# EAGLE board WayHugeAngryTroll-Panel (EAGLE 8.4.1)
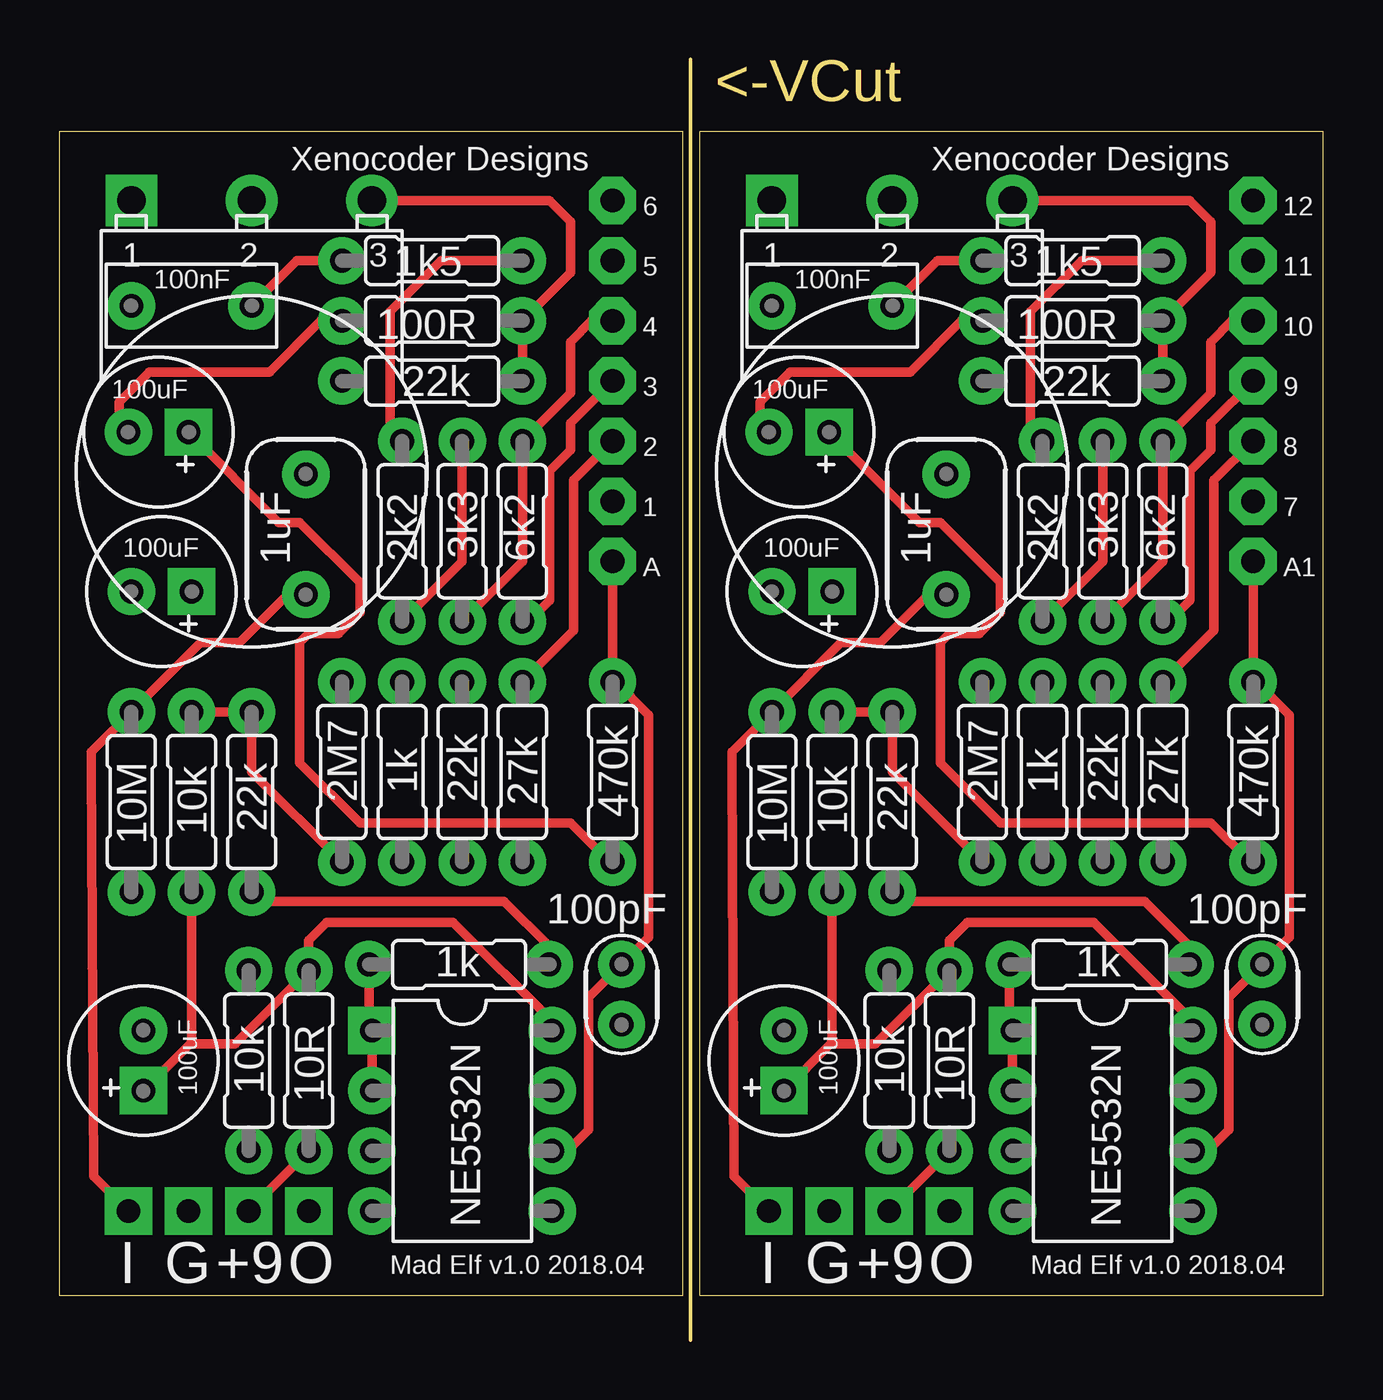
[diagram p0: board, top side]
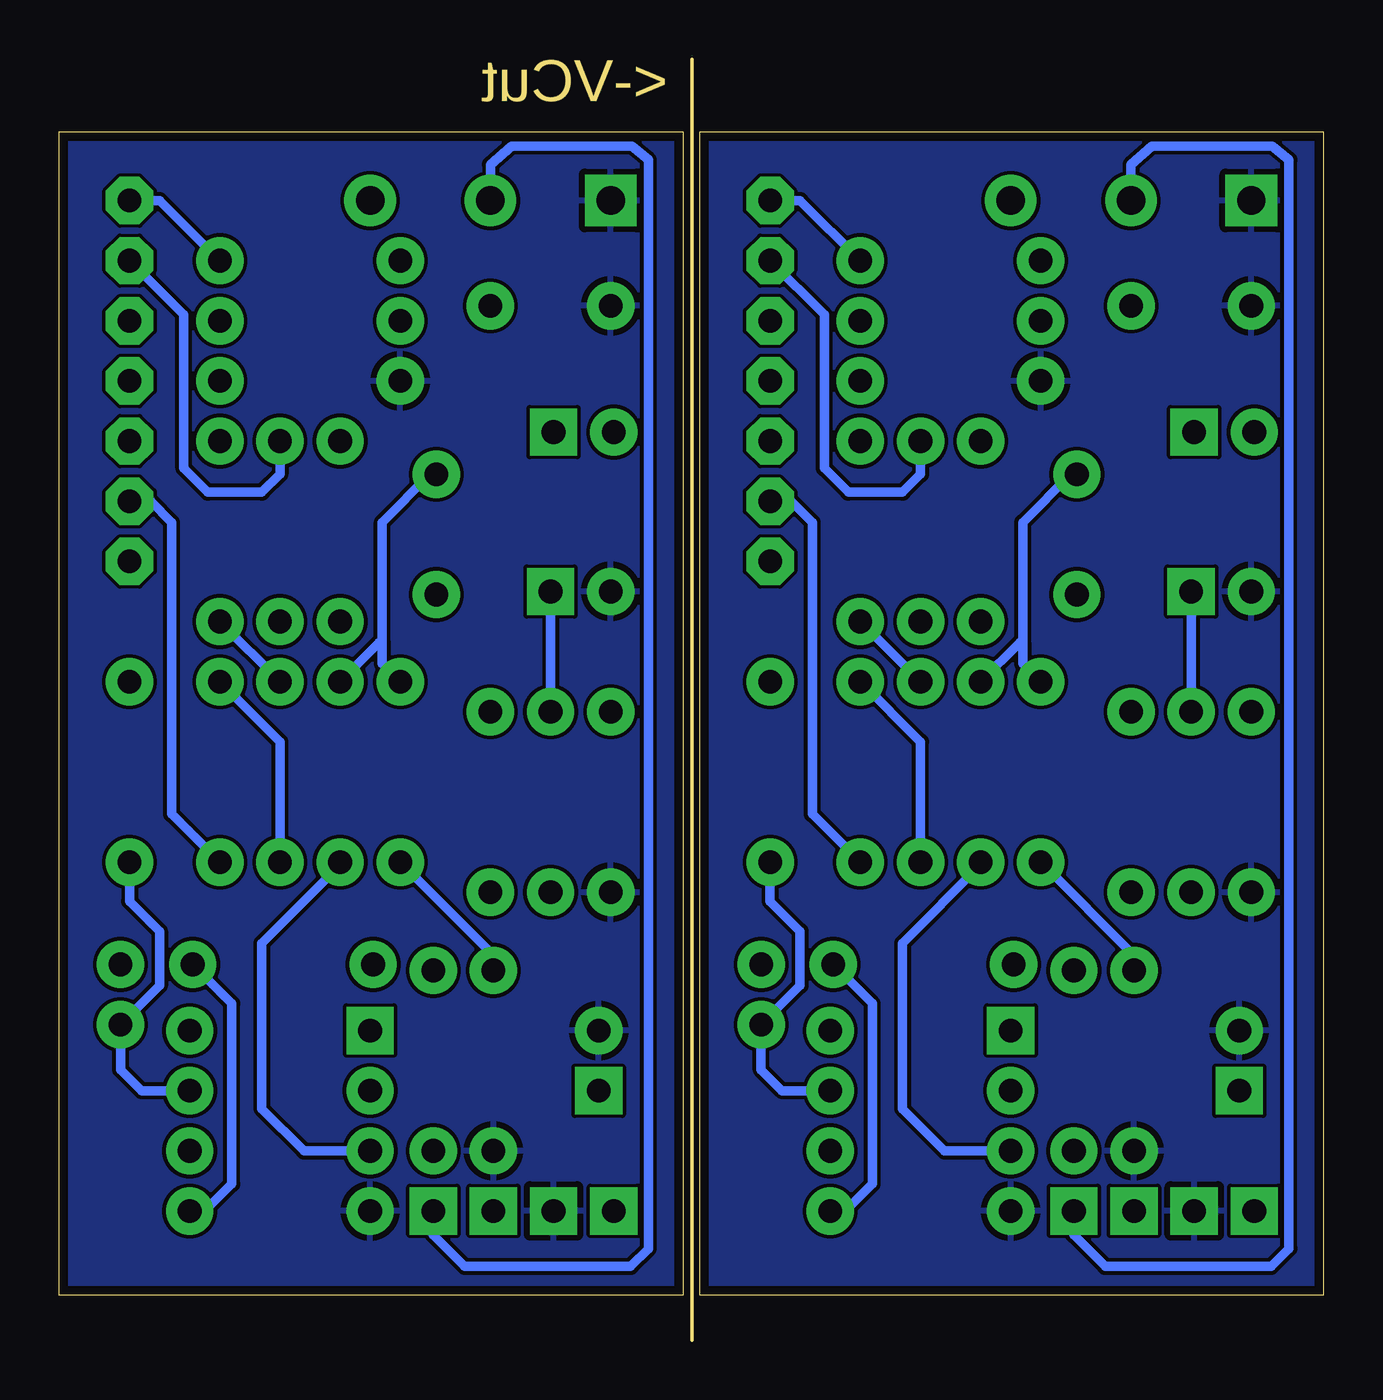
[diagram p1: board, bottom side, seen from below]

Size 53.39 x 54.1 mm. Coordinates in mm from the lower left corner, seen from the top.
Outline: 26.67,54.1 26.67,0
Outline: 0,1.91 26.34,1.91 26.34,51.04 0,51.04 0,1.91
Outline: 27.05,1.91 53.39,1.91 53.39,51.04 27.05,51.04 27.05,1.91
Copper layers (1*16): Top 0.035559375mm / dielectric 1.6mm / Bottom 0.035559375mm
Design rules "oshpark-2layer": minimum track width 6mil, minimum drill 10mil, track to track 6mil, track to pad 6mil, pad to pad 6mil, via to via 6mil, smd to smd 6mil, copper to edge 15mil, drill to drill 6mil, minimum pad ring 5mil, minimum via ring 5mil, stop-mask expansion 2.5mil, vias tented up to drill 0mil, thermal gap 10mil

## Footprints (pad centres in the part's own frame; a part is rotated, then mirrored left to right if it is on the bottom)
OCTOGON = drill 1 pad 2 octagon: 1 0,0
SQUARE = drill 1 pad 2 square: 1 0,0
063_025 = drill 1 pad 2 square: + -1.27,0 | drill 1 pad 2: - 1.27,0
080X050 = drill 1 pad 2: 1 -2.54,0; 2 2.54,0
072X035 = drill 1 pad 2: 1 -2.54,0; 2 2.54,0
050X030_025 = drill 1 pad 2: 1 -1.27,0; 2 1.27,0
DIL08 = drill 1 pad 2 square: 1 -3.81,-3.81 | drill 1 pad 2: 2 -1.27,-3.81; 3 1.27,-3.81; 4 3.81,-3.81; 5 3.81,3.81; 6 1.27,3.81; 7 -1.27,3.81; 8 -3.81,3.81
16MM-ROUND = drill 1.2 pad 2.184 square: 1 5.08,0 | drill 1.2 pad 2.184: 2 0,0; 3 -5.08,0
R0207/3 = drill 1 pad 2: 1 -3.81,0; 2 3.81,0

## Placement (x,y rotation side)
1  [OCTOGON]  23.37,35.43 0 top
2  [OCTOGON]  23.37,37.97 0 top
3  [OCTOGON]  23.37,40.51 0 top
4  [OCTOGON]  23.37,43.05 0 top
5  [OCTOGON]  23.37,45.59 0 top
6  [OCTOGON]  23.37,48.13 0 top
7  [OCTOGON]  50.42,35.43 0 top
8  [OCTOGON]  50.42,37.97 0 top
9  [OCTOGON]  50.42,40.51 0 top
10  [OCTOGON]  50.42,43.05 0 top
11  [OCTOGON]  50.42,45.59 0 top
12  [OCTOGON]  50.42,48.13 0 top
+1  +9V(T)  [SQUARE]  35.05,5.46 0 top
+9  +9V(T)  [SQUARE]  8,5.46 0 top
A  [OCTOGON]  23.37,32.89 0 top
A1  [OCTOGON]  50.42,32.89 0 top
C1  100uF  [063_025]  3.56,11.81 90 top
C2  100uF  [063_025]  4.32,31.62 180 top
C3  100uF  [063_025]  4.19,38.35 180 top
C4  1uF  [080X050]  10.41,34.04 90 top
C5  100nF  [072X035]  5.59,43.69 0 top
C6  100pF  [050X030_025]  23.75,14.61 270 top
C7  100uF  [063_025]  30.61,11.81 90 top
C8  100uF  [063_025]  31.37,31.62 180 top
C9  100uF  [063_025]  31.24,38.35 180 top
C10  1uF  [080X050]  37.47,34.04 90 top
C11  100nF  [072X035]  32.64,43.69 0 top
C12  100pF  [050X030_025]  50.8,14.61 270 top
G  GND(T)  [SQUARE]  5.46,5.46 0 top
G1  GND(T)  [SQUARE]  32.51,5.46 0 top
I  IN(T)  [SQUARE]  2.92,5.46 0 top
I1  IN(T)  [SQUARE]  29.97,5.46 0 top
IC1  NE5532N  [DIL08]  17.02,9.27 270 top
IC2  NE5532N  [DIL08]  44.07,9.27 270 top
O  OUT(T)  [SQUARE]  10.54,5.46 0 top
O1  OUT(T)  [SQUARE]  37.59,5.46 0 top
POT1  A10k  [16MM-ROUND]  8.13,48.13 180 top
POT2  A10k  [16MM-ROUND]  35.18,48.13 180 top
R1  10R  [R0207/3]  10.54,11.81 270 top
R2  10k  [R0207/3]  5.59,22.73 270 top
R3  10k  [R0207/3]  8,11.81 90 top
R4  10M  [R0207/3]  3.05,22.73 90 top
R5  2M7  [R0207/3]  11.94,24 90 top
R6  1k  [R0207/3]  14.48,24 90 top
R7  1k  [R0207/3]  16.89,15.88 180 top
R8  22k  [R0207/3]  8.13,22.73 270 top
R9  100R  [R0207/3]  15.75,43.05 180 top
R10  22k  [R0207/3]  15.75,40.51 0 top
R11  470k  [R0207/3]  23.37,24 90 top
R12  1k5  [R0207/3]  15.75,45.59 180 top
R13  2k2  [R0207/3]  14.48,34.16 90 top
R14  3k3  [R0207/3]  17.02,34.16 90 top
R15  6k2  [R0207/3]  19.56,34.16 90 top
R16  22k  [R0207/3]  17.02,24 90 top
R17  27k  [R0207/3]  19.56,24 90 top
R18  10R  [R0207/3]  37.59,11.81 270 top
R19  22k  [R0207/3]  42.8,40.51 0 top
R20  470k  [R0207/3]  50.42,24 90 top
R21  1k5  [R0207/3]  42.8,45.59 180 top
R22  2k2  [R0207/3]  41.53,34.16 90 top
R23  3k3  [R0207/3]  44.07,34.16 90 top
R24  6k2  [R0207/3]  46.61,34.16 90 top
R25  22k  [R0207/3]  44.07,24 90 top
R26  27k  [R0207/3]  46.61,24 90 top
R27  10k  [R0207/3]  32.64,22.73 270 top
R28  10k  [R0207/3]  35.05,11.81 90 top
R29  10M  [R0207/3]  30.1,22.73 90 top
R30  2M7  [R0207/3]  38.99,24 90 top
R31  1k  [R0207/3]  41.53,24 90 top
R32  1k  [R0207/3]  43.94,15.88 180 top
R33  22k  [R0207/3]  35.18,22.73 270 top
R34  100R  [R0207/3]  42.8,43.05 180 top

## Library data of the parts
1-12 +1 +9 A A1 G G1 I I1 O O1 = mb_supply
C1-C3 C7-C9 = mb_caps-electro
C4 C10 = mb_caps-chicklet
C5 C11 = mb_caps-box
C6 C12 = mb_caps-ceramic
IC1 IC2 = mb_ics
POT1 POT2 = mb_pots
R1-R34 = mb_resistors

## Nets
+9V: +9.1 R1.2
+9V1: +1.1 R18.2
GND: C1.- C2.- C5.1 G.1 IC1.4 POT1.1 R3.1 R4.1 R10.1
GND1: C7.- C8.- C11.1 G1.1 IC2.4 POT2.1 R19.1 R28.1 R29.1
IN: C4.1 I.1 R4.2
IN1: C10.1 I1.1 R29.2
N$1: C1.+ IC1.8 R1.1 R2.2
N$2: C2.+ R2.1 R3.2 R5.1 R8.1
N$3: C4.2 R5.2 R6.2
N$4: IC1.3 R6.1
N$5: IC1.1 IC1.2 R7.2
N$6: C5.2 R12.2
N$7: IC1.5 R7.1 R8.2
N$8: 6.1 R12.1 R13.2
N$9: POT1.3 R9.1 R10.2
N$10: 5.1 R13.1 R14.2
N$11: C3.+ C6.2 IC1.7 R11.1
N$12: C3.- R9.2
N$13: A.1 C6.1 IC1.6 R11.2
N$14: 4.1 R14.1 R15.2
N$15: 3.1 R15.1 R16.2
N$16: 2.1 R16.1 R17.2
N$17: 1.1 R17.1
N$18: C7.+ IC2.8 R18.1 R27.2
N$19: C8.+ R27.1 R28.2 R30.1 R33.1
N$20: C10.2 R30.2 R31.2
N$21: IC2.3 R31.1
N$22: IC2.1 IC2.2 R32.2
N$23: IC2.5 R32.1 R33.2
N$24: POT2.3 R19.2 R34.1
N$25: C9.+ C12.2 IC2.7 R20.1
N$26: C9.- R34.2
N$27: A1.1 C12.1 IC2.6 R20.2
N$28: C11.2 R21.2
N$29: 12.1 R21.1 R22.2
N$30: 11.1 R22.1 R23.2
N$31: 10.1 R23.1 R24.2
N$32: 9.1 R24.1 R25.2
N$33: 8.1 R25.1 R26.2
N$34: 7.1 R26.1
OUT: O.1 POT1.2
OUT1: O1.1 POT2.2

## Tracks (layer width: path | path; a pad name or v marks a point on that pad's centre or on a via)
+9V
  Top 0.406: +9.1 R1.2
+9V1
  Top 0.406: +1.1 R18.2
GND
  pour Bottom: 0,51.05 0,1.91 26.29,1.91 26.29,51.05
GND1
  pour Bottom: 27.05,51.05 27.05,1.91 53.34,1.91 53.34,51.05
IN
  Top 0.406: I.1 1.45,6.93 1.36,24.38 1.36,24.85 R4.2 5.97,29.46 7.62,29.46 9.65,31.5 C4.1
IN1
  Top 0.406: I1.1 28.5,6.93 28.41,24.38 28.41,24.85 R29.2 33.02,29.46 34.67,29.46 36.7,31.5 C10.1
N$1
  Top 0.406: 5.53,12.51 C1.+ | 5.53,12.51 5.59,12.57 R2.2 | 5.53,12.51 7.43,12.51 R1.1 10.54,16.89 11.3,17.65 16.64,17.65 20.83,13.46 IC1.8
N$2
  Top 0.406: 11.94,19.56 R5.1 8.13,24 R8.1 R2.1
  Bottom 0.406: C2.+ R2.1 | R3.2 8,16.26 R5.1
N$3
  Bottom 0.406: R5.2 12.7,28.57 12.7,29.46 | 12.7,29.46 12.7,34.54 10.67,36.58 C4.2 | R6.2 12.83,29.46 12.7,29.46
N$4
  Bottom 0.406: R6.1 14.48,20.07 17.78,16.76 17.78,9.78 16,8 IC1.3
N$5
  Top 0.406: R7.2 13.08,13.21 IC1.1 IC1.2
N$6
  Top 0.406: C5.2 10.03,45.59 R12.2
N$7
  Top 0.406: R7.1 20.7,16.64 18.8,18.54 8.51,18.54 R8.2
  Bottom 0.406: IC1.5 20.19,5.46 19.05,6.6 19.05,14.22 R7.1
N$8
  Top 0.406: R13.2 13.97,38.48 13.97,43.43 16.13,45.59 R12.1
  Bottom 0.406: R12.1 22.1,48.13 6.1
N$9
  Top 0.406: POT1.3 20.7,48.13 21.59,47.24 21.59,45.09 R9.1 R10.2
N$10
  Top 0.406: R13.1 17.02,32.89 R14.2
  Bottom 0.406: R14.2 17.02,36.58 17.78,35.81 20.07,35.81 21.08,36.83 21.08,43.31 5.1
N$11
  Top 0.406: C3.+ 9.27,34.54 10.16,34.54 12.7,32 12.7,30.73 11.81,29.85 10.54,29.85 10.16,29.46 10.16,24.38 12.7,21.84 21.59,21.84 23.24,20.19 R11.1
  Bottom 0.406: R11.1 23.37,18.54 22.1,17.27 22.1,14.99 C6.2 23.75,11.43 22.86,10.54 IC1.7
N$12
  Top 0.406: C3.- 2.54,38.73 2.54,39.62 3.81,40.89 8.89,40.89 11.05,43.05 R9.2
N$13
  Top 0.406: A.1 R11.2 23.49,27.81 24.89,26.42 24.89,17.02 C6.1 22.35,14.48 22.35,8.89 21.46,8 IC1.6
N$14
  Top 0.406: 4.1 22.48,43.05 21.59,42.16 21.59,40.01 R15.2 19.56,32.89 R14.1
N$15
  Top 0.406: R15.1 19.81,30.35 20.7,31.24 20.7,36.7 21.59,37.59 21.59,38.73 3.1
  Bottom 0.406: R16.2 R15.1
N$16
  Top 0.406: R17.2 21.72,29.97 21.72,36.32 2.1
  Bottom 0.406: R16.1 17.02,25.27 R17.2
N$17
  Bottom 0.406: R17.1 21.59,22.23 21.59,34.54 22.48,35.43 1.1
N$18
  Top 0.406: 32.58,12.51 C7.+ | 32.58,12.51 32.64,12.57 R27.2 | 32.58,12.51 34.48,12.51 R18.1 37.59,16.89 38.35,17.65 43.69,17.65 47.88,13.46 IC2.8
N$19
  Top 0.406: 38.99,19.56 R30.1 35.18,24 R33.1 R27.1
  Bottom 0.406: C8.+ R27.1 | R28.2 35.05,16.26 R30.1
N$20
  Bottom 0.406: R30.2 39.75,28.57 39.75,29.46 | 39.75,29.46 39.75,34.54 37.72,36.58 C10.2 | R31.2 39.88,29.46 39.75,29.46
N$21
  Bottom 0.406: R31.1 41.53,20.07 44.83,16.76 44.83,9.78 43.05,8 IC2.3
N$22
  Top 0.406: R32.2 40.13,13.21 IC2.1 IC2.2
N$23
  Top 0.406: R32.1 47.75,16.64 45.85,18.54 35.56,18.54 R33.2
  Bottom 0.406: IC2.5 47.24,5.46 46.1,6.6 46.1,14.22 R32.1
N$24
  Top 0.406: POT2.3 47.75,48.13 48.64,47.24 48.64,45.09 R34.1 R19.2
N$25
  Top 0.406: C9.+ 36.32,34.54 37.21,34.54 39.75,32 39.75,30.73 38.86,29.85 37.59,29.85 37.21,29.46 37.21,24.38 39.75,21.84 48.64,21.84 50.29,20.19 R20.1
  Bottom 0.406: R20.1 50.42,18.54 49.15,17.27 49.15,14.99 C12.2 50.8,11.43 49.91,10.54 IC2.7
N$26
  Top 0.406: C9.- 29.59,38.73 29.59,39.62 30.86,40.89 35.94,40.89 38.1,43.05 R34.2
N$27
  Top 0.406: A1.1 R20.2 50.55,27.81 51.94,26.42 51.94,17.02 C12.1 49.4,14.48 49.4,8.89 48.51,8 IC2.6
N$28
  Top 0.406: C11.2 37.08,45.59 R21.2
N$29
  Top 0.406: R22.2 41.02,38.48 41.02,43.43 43.18,45.59 R21.1
  Bottom 0.406: R21.1 49.15,48.13 12.1
N$30
  Top 0.406: R22.1 44.07,32.89 R23.2
  Bottom 0.406: R23.2 44.07,36.58 44.83,35.81 47.12,35.81 48.13,36.83 48.13,43.31 11.1
N$31
  Top 0.406: 10.1 49.53,43.05 48.64,42.16 48.64,40.01 R24.2 46.61,32.89 R23.1
N$32
  Top 0.406: R24.1 46.86,30.35 47.75,31.24 47.75,36.7 48.64,37.59 48.64,38.73 9.1
  Bottom 0.406: R25.2 R24.1
N$33
  Top 0.406: R26.2 48.77,29.97 48.77,36.32 8.1
  Bottom 0.406: R25.1 44.07,25.27 R26.2
N$34
  Bottom 0.406: R26.1 48.64,22.23 48.64,34.54 49.53,35.43 7.1
OUT
  Bottom 0.406: O.1 10.54,4.45 9.22,3.12 2.21,3.12 1.46,3.87 1.46,49.85 2.16,50.42 7.24,50.42 8.13,49.66 POT1.2
OUT1
  Bottom 0.406: O1.1 37.59,4.45 36.27,3.12 29.26,3.12 28.51,3.87 28.51,49.85 29.21,50.42 34.29,50.42 35.18,49.66 POT2.2

## Text on the board
Dimension: <-VCut
tNames: Xenocoder Designs | Xenocoder Designs | I | G | +9 | O | Mad Elf v1.0 2018.04 | I | G | +9 | O | Mad Elf v1.0 2018.04